# Altium PCB AD_Attacking_Board.pcbdoc
Units mm, origin at the board's own origin, x right, y up, seen from the top; angles counter-clockwise.
Board outline 102.75 x 76.05 mm, 2 copper layers (Top Layer, Bottom Layer); 65 components, 72 nets, 272 pads, 189 vias.
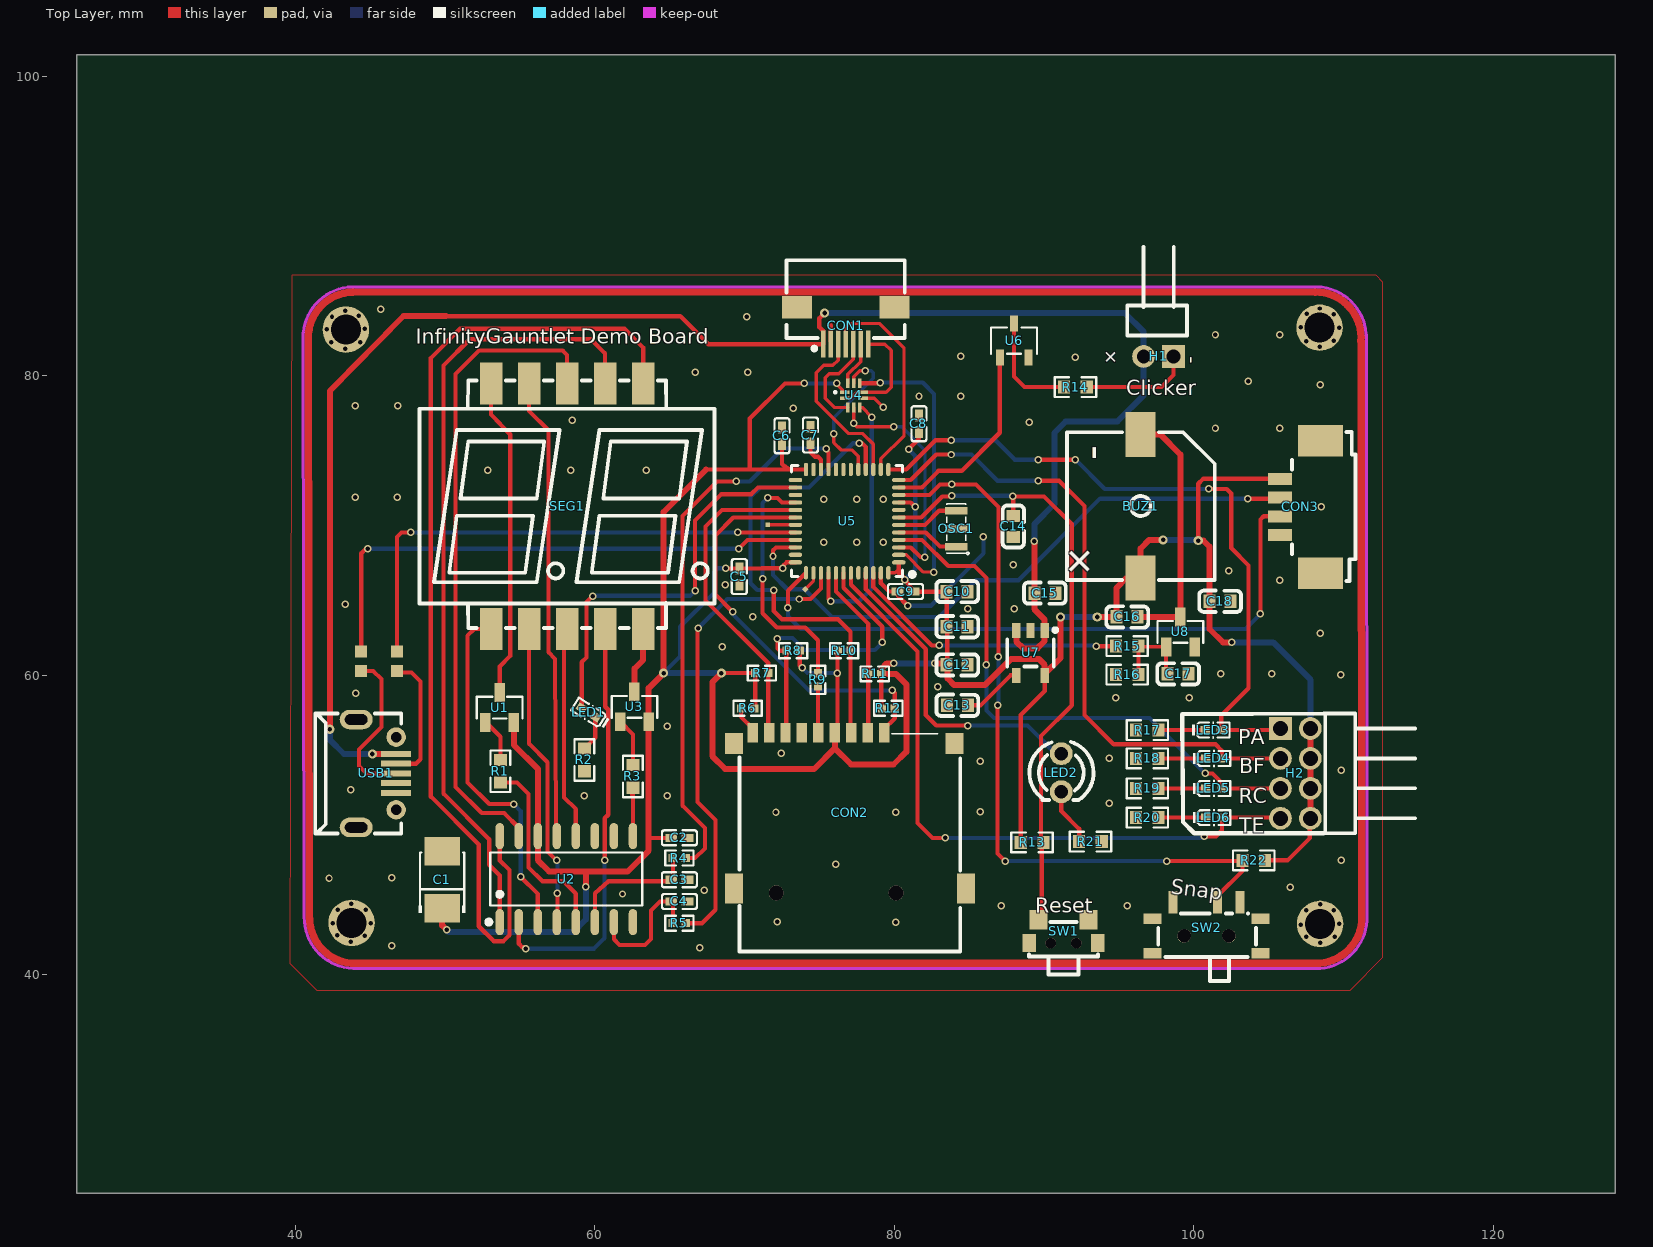
[diagram p0: Top Layer view]
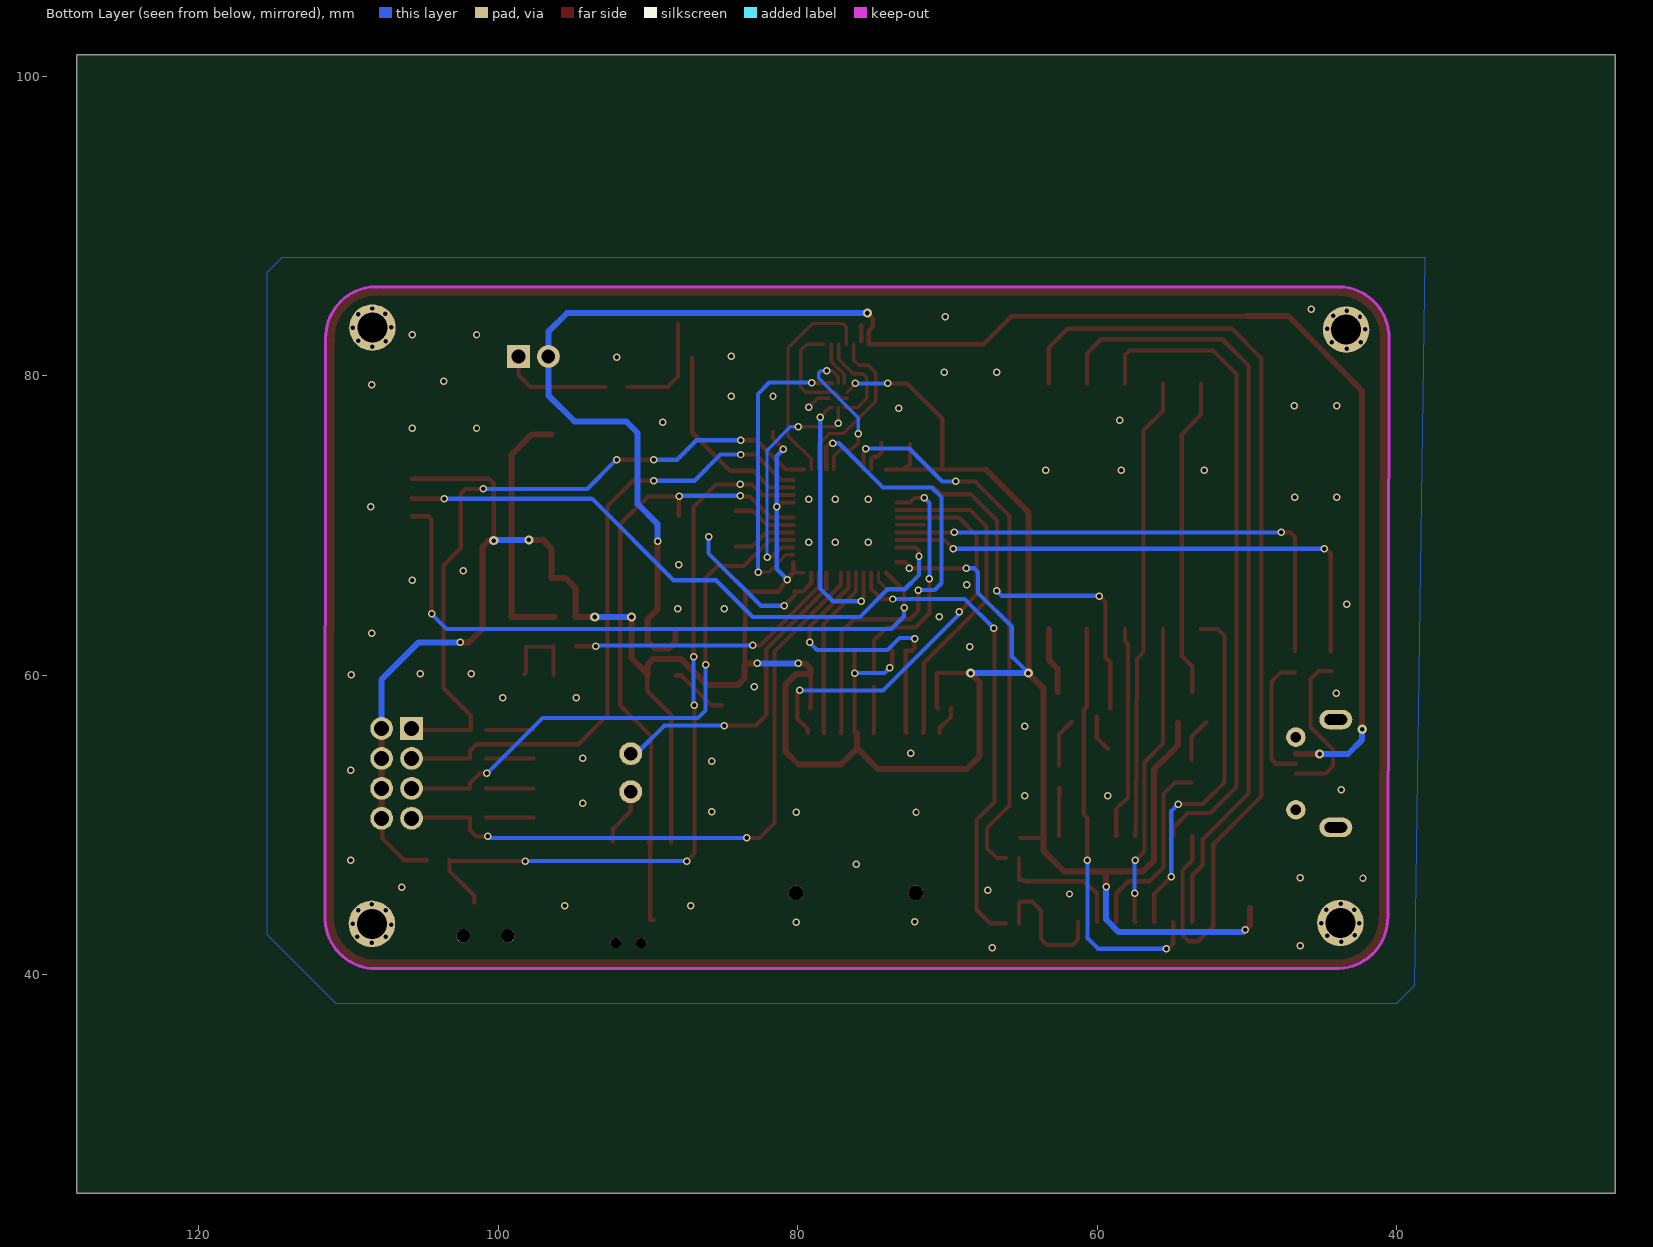
[diagram p1: Bottom Layer view, seen from below]

## Layer stack, top to bottom
Top Layer: signal copper (thickness not stored)
Dielectric: dielectric 0.32, FR-4, Dk 4.8
Bottom Layer: signal copper (thickness not stored)

## Board outline
128.15,25.4 25.4,25.4 25.4,101.45 128.15,101.45

## Components (designator, comment, footprint, x,y, rotation, side; value= is the part's Value field where it differs from the comment)
BUZ1 "BUZ-SMD_GSD9605YB-3V2800" BUZ-SMD_GSD9605YB-3V2800 96.45,71.3 r0 top
C1 "CAP-SMD_L3.5-W2.8-R-RD" CAP-SMD_L3.5-W2.8-R-RD 49.8,46.35 r270 top
C2 "C0402" C0402_NEW 65.65,49.15 r180 top
C3 "C0402" C0402 65.65,46.35 r180 top
C4 "C0402" C0402 65.65,44.9 r180 top
C5 "C0402" C0402_NEW 69.65,66.6 r90 top
C6 "C0402" C0402_NEW 72.5,76 r270 top
C7 "C0402" C0402 74.4,76.05 r270 top
C8 "C0402" C0402_NEW 81.65,76.8 r270 top
C9 "C0402" C0402_NEW 80.75,65.6 r0 top
C10 "C0603" C0603 84.2,65.6 r180 top
C11 "C0603" C0603 84.2,63.25 r180 top
C12 "C0603" C0603 84.2,60.7 r180 top
C13 "C0603" C0603 84.215,58 r0 top
C14 "C0603" C0603 87.95,69.95 r90 top
C15 "C0603" C0603 90.05,65.5 r180 top
C16 "C0603" C0603 95.55,63.9 r180 top
C17 "C0603" C0603 98.95,60.1 r180 top
C18 "C0603" C0603 101.75,64.95 r180 top
CON1 "FPC-SMD_7P-P0.50_KINGHELM_KH-FG0.5-H2.0-7PIN" FPC-SMD_7P-P0.50_KINGHELM_KH-FG0.5-H2.0-7PIN 76.75,83.35 r180 top
CON2 "TF-SMD_TF-01A" TF-SMD_TF-01A 77.032,50.961 r0 top
CON3 "CONN-SMD_4P-P1.25_X9821WRS-04-9TSN" CONN-SMD_4P-P1.25_X9821WRS-04-9TSN 107.1,71.25 r90 top
H1 "HDR-TH_2P-P2.00-H-M-W6.8" HDR-TH_2P-P2.00-H-M-W6.8 97.65,81.3 r180 top
H2 "HDR-TH_8P-P2.00-H-F-R2-C2-S2.00-W8.8" HDR-TH_8P-P2.00-H-F-R2-C2-S2.00-W8.8 106.782,53.456 r270 top
LED1 "LED0402-RD" LED0402-RD 59.588,57.525 r148 top
LED2 "C99771" LED-TH_BD3.0-P2.54-FD 91.15,53.5 r270 top
LED3 "LED0402-RD" LED0402-RD 101.3,56.35 r0 top
LED4 "LED0402-RD" LED0402-RD 101.35,54.45 r0 top
LED5 "LED0402-RD" LED0402-RD 101.35,52.45 r0 top
LED6 "LED0402-RD" LED0402-RD 101.35,50.5 r0 top
OSC1 "OSC-SMD_3P-L3.2-W1.3-P1.20" OSC-SMD_3P-L3.2-W1.3-P1.20 84.15,69.8 r90 top
R1 "R0603" R0603 53.7,53.6 r270 top
R2 "R0603" R0603 59.3,54.35 r270 top
R3 "R0603" R0603 62.55,53.25 r270 top
R4 "R0402" R0402 65.65,47.8 r0 top
R5 "R0402" R0402 65.65,43.45 r0 top
R6 "R0402" R0402 70.2,57.8 r0 top
R7 "R0402" R0402 71.15,60.15 r180 top
R8 "R0402" R0402 73.25,61.65 r0 top
R9 "R0402" R0402 74.9,59.7 r270 top
R10 "R0402" R0402 76.65,61.65 r180 top
R11 "R0402" R0402 78.7,60.1 r0 top
R12 "R0402" R0402 79.6,57.8 r180 top
R13 "R0603" R0603 89.2,48.85 r180 top
R14 "R0603" R0603 92.1,79.25 r0 top
R15 "R0603" R0603 95.55,61.95 r180 top
R16 "R0603" R0603_NEW 95.55,60.05 r0 top
R17 "R0603" R0603 96.9,56.35 r0 top
R18 "R0603" R0603 96.9,54.45 r0 top
R19 "R0603" R0603 96.9,52.45 r0 top
R20 "R0603" R0603 96.9,50.5 r0 top
R21 "R0603" R0603 93.1,48.9 r180 top
R22 "R0603" R0603 104,47.65 r0 top
SEG1 "LED-SEG-SMD_SLS0392FW2A1GD" LED-SEG-SMD_SLS0392FW2A1GD 58.15,71.3 r0 top
SW1 "SW-SMD_TS24CA" SW-SMD_TS24CA 91.3,42.9 r180 top
SW2 "SW-TH_MSK12C02-HB" SW-TH_MSK12C02-HB 100.85,43.15 r0 top
U1 "SOT-23-3_L2.9-W1.3-P1.90-LS2.4-BR" SOT-23-3_L2.9-W1.3-P1.90-LS2.4-BR 53.65,57.85 r270 top
U2 "SOP-16_L10.0-W3.9-P1.27-LS6.0-BL" SOP-16_L10.0-W3.9-P1.27-LS6.0-BL 58.1,46.4 r0 top
U3 "SOT-23-3_L2.9-W1.3-P1.90-LS2.4-BR" SOT-23-3_L2.9-W1.3-P1.90-LS2.4-BR 62.65,57.9 r270 top
U4 "RS2117" WQFN-10_L1.8-W1.4-P0.40-BL-EP 77.3,78.7 r270 top
U5 "STM32F412CEU6" UFQFPN-48_L7.0-W7.0-P0.50-BL-EP 76.85,70.3 r90 top
U6 "AO3400A" SOT-23-3_L2.9-W1.6-P1.90-LS2.8-BR 88,82.35 r270 top
U7 "RT9193" SOT-23-5_L3.0-W1.7-P0.95-LS2.8-BR 89.097,61.502 r90 top
U8 "SOT-23-3_L2.9-W1.3-P1.90-LS2.4-BR" SOT-23-3_L2.9-W1.3-P1.90-LS2.4-BR 99.1,62.9 r270 top
USB1 "MICRO-USB-SMD_MICROXNJ" MICRO-USB-SMD_MICROXNJ 45.4,53.45 r270 top

## Footprints (in the part's own frame and the unit in brackets; to place one, negate y for a bottom-side part, rotate by r counter-clockwise, add the part's x,y. Pads: shape width x height; smd on the part's side, far side on the other; paste and mask are expansions set on the pad)
BUZ-SMD_GSD9605YB-3V2800 [mm]
  rect 2x3 smd: 1(0,-4.8) 2(0,4.8)
  silkscreen extent -4.92,-4.94 4.95,4.93
C0402 [mm]
  rect 0.79x0.54 smd: 1(-0.545,0) 2(0.545,0)
  silkscreen extent -1.17,-0.5 1.17,0.5
C0402_NEW [mm]
  rect 0.79x0.54 smd: 1(-0.545,0) 2(0.545,0)
  silkscreen extent -1.17,-0.5 1.17,0.5
C0603 [mm]
  rect 0.8x0.9 smd: 1(-0.7,0) 2(0.7,0)
  silkscreen extent -1.41,-0.71 1.39,0.72
CAP-SMD_L3.5-W2.8-R-RD [mm]
  rect 1.9x2.376 smd: 1(1.898,0) 2(-1.899,0)
  silkscreen extent -1.83,-1.55 2.21,1.55
CONN-SMD_4P-P1.25_X9821WRS-04-9TSN [mm]
  rect 0.8x1.6 smd: 1(-1.875,1.35) 2(-0.625,1.35) 3(0.625,1.35) 4(1.875,1.35)
  rect 2.1x3 smd: 5(4.425,-1.35) 6(-4.425,-1.35)
  silkscreen extent -4.95,-3.7 5,0.55
FPC-SMD_7P-P0.50_KINGHELM_KH-FG0.5-H2.0-7PIN [mm]
  rect 0.3x1.8 smd: 1(1.5,1.225) 2(1,1.225) 3(0.5,1.225) 4(0,1.225) 5(-0.5,1.225) 6(-1,1.225) 7(-1.5,1.225)
  rect 2x1.5 smd: 8(-3.25,-1.225) 9(3.25,-1.225)
  silkscreen extent -3.95,-4.38 3.95,1.65
HDR-TH_2P-P2.00-H-M-W6.8 [mil]
  rect 60x60 hole 36: 1(-39.37,0)
  round 60 hole 36: 2(39.37,0)
  silkscreen extent -75,-287 82,-55
HDR-TH_8P-P2.00-H-F-R2-C2-S2.00-W8.8 [mm]
  rect 1.524x1.524 hole 1: 1(-3,-1)
  round 1.524 hole 1: 2(-3,1) 3(-1,-1) 4(-1,1) 5(1,-1) 6(1,1) 7(3,-1) 8(3,1)
  silkscreen extent -4,2 4,8
LED0402-RD [mm]
  rect 0.636x0.54 smd: 1(-0.538,0) 2(0.538,0)
  silkscreen extent -1.39,-0.54 1.09,0.54
LED-SEG-SMD_SLS0392FW2A1GD [mm]
  rect 1.5x2.8 smd: 1(-5.08,-8.201) 2(-2.54,-8.201) 3(0,-8.201) 4(2.54,-8.201) 5(5.08,-8.2) 6(5.08,8.201) 7(2.54,8.201) 8(0,8.201) 9(-2.54,8.201) 10(-5.08,8.201)
  silkscreen extent -9.85,-8.13 9.85,8.38
LED-TH_BD3.0-P2.54-FD [mil]
  round 60 hole 36: 1(-50,-0.01) 2(50,-0.01)
  silkscreen extent -81,-84 72,85
MICRO-USB-SMD_MICROXNJ [mm]
  rect 0.4x2 smd: 1(-1.3,1.327) 2(-0.65,1.327) 3(0,1.327) 4(0.65,1.327) 5(1.3,1.327)
  round 1.3 hole 0.7: 6(2.425,1.335) 9(-2.425,1.335)
  oval 1.3x2.2 hole 0.7 slot 1.5 at 90 deg: 7(3.6,-1.335) 8(-3.6,-1.335)
  silkscreen extent -4,-4.07 4,1.68
OSC-SMD_3P-L3.2-W1.3-P1.20 [mm]
  rect 0.5x1.5 smd: 1(-1.2,0) 2(0,0) 3(1.2,0)
  silkscreen extent -1.73,-0.84 1.65,0.64
R0402 [mm]
  rect 0.566x0.54 smd: 1(-0.433,0) 2(0.433,0)
  silkscreen extent -0.94,-0.5 0.94,0.5
R0603 [mm]
  rect 0.806x0.864 smd: 1(-0.753,0) 2(0.753,0)
  silkscreen extent -1.39,-0.66 1.39,0.66
R0603_NEW [mm]
  rect 0.806x0.864 smd: 1(-0.753,0) 2(0.753,0)
  silkscreen extent -1.39,-0.66 1.39,0.66
SOP-16_L10.0-W3.9-P1.27-LS6.0-BL [mm]
  oval 0.56x1.745 smd: 1(-4.445,-2.873) 2(-3.175,-2.873) 3(-1.905,-2.873) 4(-0.635,-2.873) 5(0.635,-2.873) 6(1.905,-2.873) 7(3.175,-2.873) 8(4.445,-2.873) 9(4.445,2.873) 10(3.175,2.873) 11(1.905,2.873) 12(0.635,2.873) 13(-0.635,2.873) 14(-1.905,2.873) 15(-3.175,2.873) 16(-4.445,2.873)
  silkscreen extent -5.33,-3.02 5.08,1.77
SOT-23-3_L2.9-W1.3-P1.90-LS2.4-BR [mm]
  rect 1.25x0.7 smd: 1(1,-0.95) 2(1,0.95) 3(-1,0)
  silkscreen extent -0.73,-1.53 0.73,1.53
SOT-23-3_L2.9-W1.6-P1.90-LS2.8-BR [mm]
  rect 1.07x0.532 smd: 1(1.135,-0.95) 2(1.135,0.95) 3(-1.135,0)
  silkscreen extent -0.88,-1.54 0.88,1.54
SOT-23-5_L3.0-W1.7-P0.95-LS2.8-BR [mm]
  rect 1x0.55 smd: 1(1.5,-0.95) 2(1.5,0) 3(1.5,0.95) 4(-1.5,0.95) 5(-1.5,-0.95)
  silkscreen extent -0.9,-1.78 1.65,1.55
SW-SMD_TS24CA [mm]
  rect 0.9x1.2 smd: 1(-2.3,0.775) 2(2.3,0.775)
  rect 1.2x1.3 smd: 3(-1.675,-0.775) 4(1.675,-0.775)
  round 0.7 hole 0.7 unplated: ""(-0.85,0.775) ""(0.85,0.775)
  silkscreen extent -2.3,-0.63 2.3,2.87
SW-TH_MSK12C02-HB [mm]
  rect 0.6x1.524 smd: 1(-2.25,1.7) 2(0.75,1.7) 3(2.25,1.7)
  rect 1.2x0.7 smd: 4(-3.6,-1.7) 4(-3.6,0.6) 4(3.6,-1.7) 4(3.6,0.6)
  round 0.9 hole 0.9 unplated: ""(-1.5,-0.55) ""(1.5,-0.55)
  silkscreen extent -3.22,-3.57 3.3,0.95
TF-SMD_TF-01A [mm]
  rect 0.7x1.3 smd: 1(2.292,5.2) 2(1.192,5.198) 3(0.096,5.2) 4(-1.004,5.2) 5(-2.103,5.2) 6(-3.201,5.2) 7(-4.297,5.2) 8(-5.395,5.2) 9(-6.499,5.2)
  rect 1.2x1.397 smd: 10(-7.747,4.502) 13(6.985,4.502)
  rect 1.2x2 smd: 11(-7.747,-5.2) 12(7.747,-5.2)
  round 1 hole 1 unplated: ""(-4.915,-5.49) ""(3.084,-5.487)
  silkscreen extent -7.37,-9.4 7.37,5.14
UFQFPN-48_L7.0-W7.0-P0.50-BL-EP [mm]
  oval 0.28x0.9 smd: 1(-2.751,-3.449) 2(-2.25,-3.449) 3(-1.75,-3.449) 4(-1.25,-3.449) 5(-0.749,-3.449) 6(-0.249,-3.449) 7(0.249,-3.449) 8(0.749,-3.449) 9(1.25,-3.449) 10(1.75,-3.449) 11(2.25,-3.449) 12(2.751,-3.449) 25(2.751,3.449) 26(2.25,3.449) 27(1.75,3.449) 28(1.25,3.449) 29(0.749,3.449) 30(0.249,3.449) 31(-0.249,3.449) 32(-0.749,3.449) 33(-1.25,3.449) 34(-1.75,3.449) 35(-2.25,3.449) 36(-2.751,3.449)
  oval 0.9x0.28 smd: 13(3.449,-2.751) 14(3.449,-2.25) 15(3.449,-1.75) 16(3.449,-1.25) 17(3.449,-0.749) 18(3.449,-0.249) 19(3.449,0.249) 20(3.449,0.749) 21(3.449,1.25) 22(3.449,1.75) 23(3.449,2.25) 24(3.449,2.751) 37(-3.449,2.751) 38(-3.449,2.25) 39(-3.449,1.75) 40(-3.449,1.25) 41(-3.449,0.749) 42(-3.449,0.249) 43(-3.449,-0.249) 44(-3.449,-0.749) 45(-3.449,-1.25) 46(-3.449,-1.75) 47(-3.449,-2.25) 48(-3.449,-2.751)
  silkscreen extent -3.7,-4.5 3.7,3.7
WQFN-10_L1.8-W1.4-P0.40-BL-EP [mm]
  rect 0.224x0.665 smd: 1(-0.2,-0.607) 2(0.2,-0.607) 6(0.2,0.607) 7(-0.2,0.607)
  rect 0.665x0.224 smd: 3(0.807,-0.4) 4(0.807,0) 5(0.807,0.4) 8(-0.807,0.4) 9(-0.807,0) 10(-0.807,-0.4)
  silkscreen extent -0.27,-1.31 -0.12,-1.17

## Free pads (board coordinates)
  rect 0.8x0.8 smd: 3(44.375,60.3) 3(44.375,61.6) 3(46.8,60.3) 3(46.8,61.6)
  rect 0.3x0.3 smd: 3(71.55,70.05)
  rect 0.3x0.3 smd rot 45: 3(74.05,65.75)
  round 3.1 hole 2: ""(43.377,83.092) ""(43.758,43.468) ""(108.401,83.219) ""(108.437,43.408)

## Via types
v1: diameter 0.5, hole 0.3, Top Layer to Bottom Layer, tented both sides, 180 vias
v2: diameter 0.61, hole 0.305, Top Layer to Bottom Layer, tented both sides, 9 vias

## Nets (pads, with @x,y where several pads share a name; then routed paths per layer and width w, separated by ;. In a path a pad name is that pad's centre, name@x,y a point inside that pad or via, vN(x,y) a via of type N, cw(c..) or ccw(c..) an arc to the next point about the centre after c; other vN are vias at no path point)
3V3: BUZ1.1 C1.1 C2.2 C5.2 C6.2 C8.2 C9.2 C10.2 C11.2 C12.2 C16.2 C18.2 CON2.4 CON3.4 H2.2 H2.4 H2.6 H2.8 R6.2 R7.2 R8.2 R10.2 R11.2 R12.2 R13.2 R22.2 U1.2 U2.14 U3.2 U4.1 U5.1 U5.9 U5.24 U5.36 U5.48 U7.5 | length 251.7
  Top Layer w0.224: v1(76.15,79.5) 76.15,79.45 76.3,79.3 U4.1 ; U5.48 80.049,66.851 80.25,67.052
  Top Layer w0.28: 63.55,49.15 C2.2 ; 67.435,73.749 U5.24 70.349,73.749 70.349,77.148 72.701,79.5 v1(74,79.5) ; v2(68.45,60.15) R7.2 70.717,57.884 R6.2 ; v1(68.75,67.15) 68.755,67.145 C5.2 71.155,67.145 71.16,67.15 v1(72.55,67.15) 72.6,67.2 72.6,67.35 72.799,67.549 U5.36 ; C6.2@72.501,75.454 72.501,74.095 72.968,73.75 ; R8.2@73.683,61.65 73.683,60.667 v1(73.85,60.5) ; CON2.4@76.18,56.16 76.2,56.181 v1(76.2,60.15) 76.217,60.167 R10.2 ; R11.2 79.133,57.834 R12.2 ; U5.9 81.1,71.549 v1(81.4,71.25) ; v1(80.95,75.1) 81.65,75.8 C8.2 ; R13.2 88.447,57.347 90.047,58.947 U7.5@90.047,60.001 ; v2(100.3,69) 100.299,72.8 100.626,73.125 CON3.4 ; R22.2 106.25,47.65 107.75,49.15 107.75,50.424 H2.8
  Top Layer w0.3: U5.1 80.3,66.85 80.7,66.45 v1(80.7,66.4) C9.2 ; C9.2@81.294,65.599 C10.2@83.499,65.599 ; C12.2@83.55,60.7 83.55,63.25 C11.2 83.5,65.55 C10.2@83.55,65.6
  Top Layer w0.4: C1.1@49.8,44.451 49.8,43.301 v1(50.098,43.002) ; U1.2 54.599,55.35 56.194,53.755 56.194,49.272 56.194,47.656 56.951,46.9 62.199,46.9 63.6,48.301 U3.2 63.6,59.15 v2(64.6,60.15) 64.6,70.914 67.435,73.749 ; v1(59.4,45.9) 59.4,46.85 59.45,46.9 ; v2(68.45,60.15) 67.85,59.551 67.85,54.601 68.701,53.75 74.65,53.75 76.029,55.127 CON2.4@76.029,56.168 ; CON2.4@76.029,56.16 76.029,55.139 77.118,54.05 79.951,54.05 80.799,54.898 80.799,59.401 80.1,60.1 R11.2 79.133,60.428 79.505,60.8 v1(79.95,60.8) ; v1(82.7,60.8) 83.45,60.8 83.55,60.7 83.55,59.8 83.999,59.351 86.052,59.351 87.802,61.101 89.648,61.101 90.047,60.702 U7.5 ; U7.5 90.047,60.097 91.1,61.15 v2(91.1,63.9) ; v2(93.55,63.9) 94.85,63.9 94.85,65.851 95.499,66.5 BUZ1.1 96.45,68.474 97.026,69.05 v2(97.95,69.05) ; v2(100.3,69) 100.649,69 101.05,68.599 101.05,64.949 101.05,63.1 101.95,62.201 v1@102.549,62.203 ; H2.8 H2.6 H2.4 H2.2
  Bottom Layer w0.28: v2(64.6,60.15) 65.7,61.25 65.7,63.25 67.95,65.5 67.95,66.9 68.2,67.15 v1(68.75,67.15) ; v1(73.85,60.5) 74.2,60.15 v1(76.2,60.15) ; v1(74,79.5) v1(76.15,79.5) ; v1(80.7,66.4) 81.4,67.1 v1(81.4,71.25) 81.4,74.65 v1(80.95,75.1)
  Bottom Layer w0.4: v1(50.098,43.002) 50.251,42.85 58.55,42.85 59.4,43.7 v1(59.4,45.9) ; v2(64.6,60.15) v2(68.45,60.15) ; v1(79.95,60.8) v1(82.7,60.8) ; v2@91.1,63.9 v2@93.55,63.9 ; v2(97.95,69.05) 100.3,69.05 v2(100.3,69) ; v1@102.549,62.203 105.295,62.203 107.799,59.701 H2.2@107.781,56.455
  other v1: 102.55,62.204
A: SEG1.3 U2.12 | length 14.2
  Top Layer w0.28: SEG1.3 58.15,62.305 57.949,62.104 57.949,51.85 58.734,51.065 U2.12@58.734,49.272
B: SEG1.9 U2.13 | length 31
  Top Layer w0.28: SEG1.9@55.61,79.5 55.61,77.659 56.9,76.371 56.9,61.55 57.35,61.101 57.4,50.25 U2.13@57.464,49.272
BEEP: R15.2 U5.46 | length 18.8
  Top Layer w0.28: U5.46 78.6,65.9 82.5,62 v1(83,62) ; v1@93.499,61.949 R15.2@94.797,61.949
  Bottom Layer w0.28: v1(83,62) 93.45,62 v1(93.5,61.95)
BP: C13.2 U7.4 | length 3.9
  Top Layer w0.28: C13.2@85.051,57.999 85.749,57.999 87.753,60.003 U7.4
C: SEG1.8 U2.15 | length 43.6
  Top Layer w0.28: U2.15@54.924,49.272 54.924,49.826 53.949,50.801 52.45,50.801 50.7,52.551 50.7,80.128 52.267,81.695 57.855,81.695 58.15,81.4 SEG1.8
CLICK: H1.1 R14.2 | length 7.4
  Top Layer w0.28: R14.2@92.854,79.249 97.85,79.249 98.65,80.049 H1.1@98.65,81.289
D: SEG1.6 U2.16 | length 66.7
  Top Layer w0.28: U2.16@53.654,49.272 53.654,47.646 54.299,47.001 54.299,42.65 53.9,42.249 53.25,42.249 52.249,43.25 52.249,48.7 49.049,51.901 49.049,81.2 51,83.15 51.914,83.15 61.978,83.15 63.23,81.898 SEG1.6
DIG0: R1.2 U2.5 | length 12.9
  Top Layer w0.28: R1.2@53.7,52.846 54.802,52.846 55.572,52.079 55.572,47.179 56.499,46.249 57.901,46.249 58.734,45.416 U2.5@58.734,43.526
DIG1: R3.2 U2.9 | length 3.7
  Top Layer w0.28: 62.5,52.047 62.5,52.447 R3.2 62.545,52.492 U2.9
DIG_1: SEG1.10 U1.3 | length 21.5
  Top Layer w0.28: SEG1.10@53.07,79.5 53.07,77.42 54.35,76.099 54.35,61.299 53.649,60.6 U1.3
DIG_2: SEG1.5 U3.3 | length 4.4
  Top Layer w0.4: U3.3 62.65,60.45 63.23,61.03 SEG1.5
DP: SEG1.2 U2.4 | length 20.4
  Top Layer w0.28: SEG1.2 55.61,55.44 56.85,54.2 56.85,48.25 v1(57.45,47.65) ; U2.4 57.5,43.563 v1(57.5,45.45)
  Bottom Layer w0.28: v1(57.45,47.65) 57.5,47.65 v1(57.5,45.45)
DR: R14.1 U6.3 | length 7.2
  Top Layer w0.28: U6.3 88,79.95 88.7,79.25 R14.1
E: SEG1.7 U2.1 | length 52.6
  Top Layer w0.28: U2.1@53.654,43.526 53.654,46.646 52.95,47.349 52.95,49.051 49.9,52.099 49.9,80.699 51.65,82.449 59.747,82.449 60.69,81.507 SEG1.7
EYE: LED1.2 U5.26 | length 27.1
  Top Layer w0.28: LED1.2 59.131,60.881 59.45,61.2 59.45,64.896 v1@59.849,65.299 ; v1(66.7,65.65) 66.7,70.35 68.45,72.1 70.45,72.1 70.9,72.55 U5.26
  Bottom Layer w0.28: v1@59.849,65.312 66.356,65.312 v1(66.7,65.65)
  other v1: 59.85,65.3
F: SEG1.4 U2.2 | length 28.6
  Top Layer w0.28: U2.2 54.925,42.075 55.15,41.85 55.4,41.85 v1(55.4,41.75) ; v1(60.65,47.65) v1@60.69,47.69
  Top Layer w0.3: v1(60.65,47.65) 60.649,50.45 60.901,50.699 60.901,57.7 60.69,57.91 SEG1.4
  Bottom Layer w0.28: v1(55.4,41.75) 59.95,41.75 60.65,42.45 v1(60.65,47.65)
G: SEG1.1 U2.3 | length 23.8
  Top Layer w0.28: SEG1.1 51.95,63.1 51.5,62.65 51.5,52.851 52.95,51.4 v1(54.6,51.4) ; v1(55.05,46.55) 56.195,45.405 U2.3
  Bottom Layer w0.28: v1(54.6,51.4) 55.05,50.95 v1(55.05,46.55)
GATE: U5.11 U6.1 | length 13.3
  Top Layer w0.28: U5.11 81.85,72.55
  Top Layer w0.3: 81.85,72.55 81.851,72.551 82.95,73.651 84.5,73.651 87.05,76.201 U6.1
GND: C1.2 C2.1 C3.1 C4.1 C5.1 C6.1 C7.1 C8.1 C9.1 C10.1 C11.1 C12.1 C13.1 C14.1 C15.1 C17.1 C18.1 CON1.2 CON1.8 CON1.9 CON2.6 CON2.10 CON2.11 CON2.12 CON2.13 CON3.1 CON3.5 CON3.6 OSC1.2 R2.2 R16.1 R17.1 R18.1 R19.1 R20.1 R21.1 SW1.1 SW1.2 SW1.3 SW2.1 SW2.4 U2.8 U4.6 U5.8 U5.20 U5.23 U5.35 U5.44 U5.47 U6.2 U7.2 U8.2 USB1.5 USB1.6 USB1.7 USB1.8 USB1.9 | length 238.4
  Top Layer w0.224: U4.6 78.65,78.5 v1(79.25,77.9)
  Top Layer w0.28: U5.47 79.101,66.149 79.651,65.599 C9.1@80.205,65.599 ; C9.1 80.205,65.345 v1(80.9,64.65)
  Top Layer w0.3: CON1.2@75.75,82.3 75.75,83.375
  Top Layer w0.5: 40.877,82.816 cw(c43.909,82.557) 43.85,85.6 ; 40.879,82.787 40.944,43.768 ; 40.95,43.75 ccw(c44.013,43.829) 43.734,40.777 ; 43.809,40.769 108.076,40.767 ; 43.857,85.603 108.124,85.601 ; 108.09,40.764 ccw(c108.137,43.862) 111.219,43.545 ; 108.124,85.609 cw(c108.117,82.557) 111.158,82.307 ; 111.17,82.306 111.217,43.544
  Bottom Layer w0.28: v1(80.9,64.65) 82.45,64.65 85.95,68.15 v1(85.95,69.25)
  other v1: 66.999,41.801 46.449,41.951 80.1,43.5 72.2,43.551 87.149,44.601 95.549,44.601 61.85,45.4 67.3,45.65 106.45,45.851 42.25,46.451 46.45,46.5 76.099,47.401 109.849,47.651 72.1,50.85 80.1,50.85 85.749,50.901 94.349,51.451 59.3,51.95 64.85,51.95 43.7,52.35 109.849,53.651 85.749,54.251 94.349,54.451 72.45,54.8 64.85,56.6 94.799,58.501 99.7,58.5 44.049,58.801 82.9,59.25 109.799,60.051 101.8,60.1 105.2,60.1 68.5,61.9 108.45,62.8 70.55,63.9 84.9,64.45 88,64.45 43.35,64.75 68.7,66.05 105.75,66.35 102.35,67 87.95,67.4 75.3,68.875 77.5,68.875 79.25,68.875 108.5,71.25 75.3,71.75 77.5,71.75 79.25,71.75 44,71.9 46.8,71.9 52.85,73.7 58.4,73.7 63.45,73.7 101.45,76.5 105.75,76.5 89,76.9 58.5,77.05 73.25,77.85 44,78 46.85,78 81.65,78.65 84.45,78.65 108.449,79.401 103.65,79.65 66.7,80.25 70.199,80.251 92.1,81.25 84.45,81.3 101.45,82.75 105.75,82.75 70.15,83.95 45.699,84.45
IIC-SCL: R4.2 U5.21 | length 37.3
  Top Layer w0.28: R4.2@66.082,47.799 66.699,47.799 67.35,48.449 67.35,49.8 65.851,51.299 65.851,70.651 68.15,72.95 v1@69.45,72.95 ; v1(75.45,75.15) 75.45,75.039 75.601,74.889 U5.21
  Bottom Layer w0.28: v1(69.45,72.95) 70.35,72.95 72.55,75.15 v1(75.45,75.15)
IIC-SDA: R5.2 U5.39 | length 32
  Top Layer w0.28: R5.2 67.149,43.45 68.051,44.349 68.051,50.349 66.849,51.55 66.849,63.099 v1(66.9,63.15) ; v1(73.65,65.1) 74.402,65.1 75.1,65.798 U5.39
  Bottom Layer w0.28: v1(66.9,63.15) 68.85,65.1 v1(73.65,65.1)
KEY: R22.1 SW2.2 U5.10 | length 50.8
  Top Layer w0.28: U5.10 82.35,72.05 83.05,72.75 v1(83.85,72.75) 85.45,72.75 86.95,71.25 v1(86.95,61.25) ; v1(86.9,58) 86.9,48.1 v1(87.4,47.6) ; v1(98.2,47.6) 103.197,47.6 R22.1 103.247,46.947 101.599,45.299 SW2.2
  Bottom Layer w0.28: v1(86.9,58) 86.95,58 v1(86.95,61.25) ; v1(87.4,47.6) v1(98.2,47.6)
MOSI_IN: U4.9 U5.17 | length 10.6
  Top Layer w0.224: v1(75.95,76.15) 75.95,75.551 76.45,75.05 77.2,75.05 77.599,74.649 U5.17 ; U4.9 77.299,79.95 77.7,80.349 v1@78.051,80.349
  Bottom Layer w0.224: v1(75.95,76.15) 75.95,77.202 78.599,79.851 78.599,80.202 78.449,80.349 v1@78.051,80.349
  other v1: 78.05,80.35
NRST: C14.2 R13.1 SW1.4 U5.7 | length 42
  Top Layer w0.28: U5.7 81.799,70.549 83.2,71.95 83.8,71.95 v1@83.85,72 ; C14.2 87.95,71.9 v1(87.899,71.95) 89.827,71.95 89.828,71.949 89.999,71.949 91.85,70.1 91.85,58.551 91.85,57.999 89.801,55.95 89.801,48.85 R13.1 89.849,48.746 89.849,43.674 SW1.4@89.625,43.674
  Bottom Layer w0.28: v1@83.85,72 87.849,72 v1(87.899,71.95)
  other v1: 83.85,72
OSC-IN: OSC1.1 U5.5 | length 4.2
  Top Layer w0.28: U5.5 82.099,69.551 83.05,68.6 OSC1.1
OSC-OUT: OSC1.3 U5.6 | length 4.2
  Top Layer w0.28: U5.6 82.05,70.051 82.999,71 OSC1.3
RXD: pad.3@71.55,70.05 U5.31 | length 1.9
  Top Layer w0.224: pad.3@71.55,70.05 U5.31 U5.31
S$1711: LED2.2 R21.2 | length 3.8
  Top Layer w0.28: LED2.2 91.15,50.95 92.347,49.753 R21.2
S$14186: 
S$16831: R1.1 U1.1 | length 2.9
  Top Layer w0.28: U1.1 52.75,56.85 53.7,55.9 R1.1
S$16841: R3.1 U3.1 | length 3.2
  Top Layer w0.28: U3.1 62.55,56.05 R3.1
S$17055: C17.2 R15.1 R16.2 U8.1 | length 5.6
  Top Layer w0.224: R15.1@96.303,61.949 96.352,61.9 U8.1
  Top Layer w0.28: R16.2 R15.1@96.303,61.949 ; U8.1 98.15,60.2 C17.2
S$192738: LED1.1 R2.1 | length 2.4
  Top Layer w0.3: R2.1 60.044,55.848 LED1.1
S$197762: BUZ1.2 C16.1 U8.3 | length 16.9
  Top Layer w0.4: C16.1@96.25,63.9 99.1,63.9 99.1,74.75 97.75,76.1 BUZ1.2
S$204186: 
S$205630: LED3.1 R17.2 | length 3.1
  Top Layer w0.28: R17.2 LED3.1
S$205634: LED4.1 R18.2 | length 3.2
  Top Layer w0.28: R18.2 LED4.1
S$205638: LED5.1 R19.2 | length 3.2
  Top Layer w0.28: R19.2 LED5.1
S$205642: LED6.1 R20.2 | length 3.2
  Top Layer w0.28: R20.2 LED6.1
S_B: H2.3 LED4.2 U5.12 | length 43.1
  Top Layer w0.28: U5.12 81.101,73.051 82.8,74.75 v1(83.8,74.75) ; v1(89.6,73) 91,73 92.699,71.301 92.699,58.35 92.699,57.352 94.65,55.401 101.449,55.401 101.889,54.962 101.889,54.451 H2.3@105.782,54.456
  Bottom Layer w0.28: v1(83.8,74.75) 85.15,74.75 86.9,73 v1(89.6,73)
S_C: H2.5 LED5.2 U5.4 | length 37.8
  Top Layer w0.28: U5.4 81.85,69.05 83.6,67.3 85.35,67.3 86.15,66.5 v1(86.15,60.7) ; v1(100.75,53.45) 101.25,53.45 101.888,52.812 LED5.2 105.775,52.45 H2.5@105.782,52.457
  Bottom Layer w0.28: v1(86.15,60.7) 86.15,57.65 86.649,57.151 97.049,57.151 v1(100.75,53.45)
S_E: H2.7 LED6.2 U5.43 | length 44
  Top Layer w0.28: U5.43 77.099,66.053 81.551,61.601 81.551,50.151 82.549,49.15 83.1,49.15 ; v1(100.7,49.25) 101.477,49.25 101.888,49.662 LED6.2 105.738,50.5 H2.7
  Bottom Layer w0.28: v1@83.4,49.15 100.7,49.15 v1@100.7,49.249
  other v1: 83.4,49.151
S_P: H2.1 LED3.2 U5.13 | length 46.2
  Top Layer w0.28: U5.13 80.799,73.75 82.75,75.701 v1@83.801,75.701 ; v1(89.6,74.4) v1(92.1,74.4) ; v1(101,72.45) 102.2,72.45 102.501,72.149 102.501,68.5 103.649,67.344 103.649,59.14 101.838,57.339 LED3.2 ; LED3.2 105.676,56.35 H2.1
  Bottom Layer w0.28: v1(83.8,75.7) 86.75,75.7 88.05,74.4 v1(89.6,74.4) ; v1@92.099,74.405 94.055,72.45 v1(101,72.45)
SCL: C3.2 R4.1 U2.6 | length 8.9
  Top Layer w0.28: U2.6@60.004,43.526 60.004,45.454 60.901,46.249 64.7,46.25 C3.2 65.216,46.351 R4.1@65.216,47.799
SD_CK: R9.1 U5.28 | length 16.5
  Top Layer w0.28: v1(71.2,66.45) 71.2,64.15 72.151,63.199 74.05,63.199 74.9,62.349 R9.1 ; v1(71.55,71.85) 72.2,71.85 72.5,71.55 U5.28
  Bottom Layer w0.28: v1(71.2,66.45) 71.2,71.5 v1(71.55,71.85)
SD_CLK: CON2.5 R9.2 | length 3.1
  Top Layer w0.28: R9.2 74.9,56.191 CON2.5
SD_CMD: CON2.3 R10.1 U5.16 | length 32.2
  Top Layer w0.28: v1(71.95,65.7) 71.95,64.301 72.501,63.75 76.25,63.75 77.083,62.917 77.083,61.649 77.083,56.206 CON2.3 ; v1(77.65,75.5) 77.85,75.5 78.1,75.25 U5.16
  Bottom Layer w0.28: v1(71.95,65.7) 70.85,65.701 70.4,66.15 70.4,71.901 71.05,72.551 74.299,72.551 77.248,75.5 v1(77.65,75.5)
SD_D0: CON2.7 R8.1 U5.42 | length 20.1
  Top Layer w0.28: v1(72.2,62.45) 72.2,61.8 72.35,61.65 R8.1@72.817,61.65 ; CON2.7 72.789,56.216 R8.1@72.789,61.629 ; U5.42 76.601,65.849 79.201,63.25 v1@79.201,62.201
  Bottom Layer w0.28: v1(72.2,62.45) 72.25,62.5 73.199,62.5 74,61.7 78.7,61.7 v1(79.2,62.2)
SD_D1: CON2.8 R7.1 U5.29 | length 22
  Top Layer w0.28: CON2.8 71.583,56.215 R7.1 71.583,60.817 67.4,65 67.4,69.95 68.5,71.049 U5.29
SD_D2: CON2.1 R12.1 U5.30 | length 27.6
  Top Layer w0.127: CON2.1@79.324,56.074 CON2.1
  Top Layer w0.28: v1(69.2,64.25) 68.05,65.4 68.05,69.35 69.249,70.549 U5.30 ; CON2.1@79.323,56.16 79.323,56.425 80.032,57.133 R12.1@80.032,57.85 ; v1(79.85,59) 80.033,58.817 R12.1@80.033,57.85
  Bottom Layer w0.28: v1(69.2,64.25) 69.2,64.1 74.3,59 v1(79.85,59)
SD_D3: CON2.2 R11.1 U5.41 | length 11.6
  Top Layer w0.28: U5.41 76.101,65.598 78.267,63.432 R11.1 78.267,56.202 CON2.2
SD_NCD: CON2.9 R6.1 | length 1.9
  Top Layer w0.28: R6.1 69.767,57.233 70.533,56.467 CON2.9@70.533,56.168
SDA: C4.2 R5.1 U2.7 | length 8.9
  Top Layer w0.28: U2.7@61.274,43.526 61.274,42.376 61.65,42 63.349,42 63.75,42.399 63.75,44.301 64.35,44.901 C4.2 ; C4.2 65.217,44.788 R5.1
SEL1: U4.4 U5.3 | length 15.7
  Top Layer w0.224: v1(77.3,76.85) 77.299,76.8 77.499,76.6 v1(79.95,76.6) ; v1(77.3,76.85) U4.4
  Top Layer w0.28: U5.3 81.1,68.55 81.75,67.9 v1(82.05,67.9)
  Bottom Layer w0.224: v1(79.95,76.6) 80.5,76.6 82.05,75.05 v1(82.05,67.9)
SEL2: U4.8 U5.2 | length 20
  Top Layer w0.224: U5.2 80.801,68.05 81.95,66.9 v1@82.651,66.9
  Top Layer w0.28: U4.8 79.049,79.508 v1@79.049,79.549
  Bottom Layer w0.28: v1(79.05,79.55) 81.9,79.55 82.65,78.8 v1(82.65,66.9)
SPI-CLK: CON1.3 U5.15 | length 11.5
  Top Layer w0.224: CON1.3@76.25,82.124 76.25,81.05 75.899,80.699 75.3,80.699 74.799,80.199 74.799,78.302 76.951,76.15 77.901,76.15 78.599,75.452 U5.15
SPI-CS: CON1.4 U5.14 | length 14.6
  Top Layer w0.224: CON1.4@76.75,82.124 76.75,83.25 76.999,83.501 79.001,83.501 80.649,81.85 80.649,76 79.1,74.451 U5.14
SPI-MISO_FAKE: U4.5 U5.40 | length 17.6
  Top Layer w0.224: U4.5@77.7,77.892 77.858,77.892 v1(78.5,77.25)
  Top Layer w0.28: U5.40 75.601,65.099 v1(75.75,64.95)
  Bottom Layer w0.28: v1(75.75,64.95) 77.65,64.95 78.5,65.8 v1(78.5,77.25)
SPI-MISO_M: CON1.5 U4.3 | length 6.5
  Top Layer w0.224: U4.3@76.9,77.885 76.008,77.885 75.399,78.5 75.399,79.892 75.65,80.151 76.301,80.151 77.251,81.101 CON1.5@77.251,82.124
SPI-MISO_S: CON1.7 U4.2 U4.7 | length 7.6
  Top Layer w0.224: U4.2 77.101,78.5 77.499,78.901 77.908,78.901 79.45,78.901 79.801,79.252 79.801,81.7 79.377,82.124 CON1.7@78.249,82.124
SPI-MOSI: CON1.6 U4.10 | length 3
  Top Layer w0.224: U4.10 76.9,80.1 77.751,80.951 CON1.6@77.751,82.124
STATE: LED2.1 U5.45 | length 21.3
  Top Layer w0.28: U5.45 78.1,65.75 82.099,61.751 82.099,57.352 82.8,56.651 v1@84.901,56.651
  Bottom Layer w0.28: v1(84.9,56.65) 88.9,56.65 90.78,54.77 LED2.1
SWDCK: CON3.2 U5.37 | length 43.4
  Top Layer w0.28: v1(72.9,64.5) 72.9,65.651 U5.37 ; v1(104.45,64.1) 104.45,70.401 104.674,70.626 CON3.2
  Bottom Layer w0.28: v1@72.9,64.499 72.9,63.951 73.75,63.1 103.449,63.1 v1(104.45,64.1)
SWDIO: CON3.3 U5.34 | length 41.6
  Top Layer w0.28: v1(71.9,67.95) 71.9,68.35 72.1,68.55 U5.34 ; v1@103.601,71.799 105.749,71.799 CON3.3
  Bottom Layer w0.28: v1(71.9,67.95) 71.899,66.701 72.851,65.749 73.999,65.749 75.848,63.9 83.001,63.9 85.45,66.351 88.3,66.351 93.748,71.799 v1@103.601,71.799
  other v1: 103.6,71.8
TXD: pad.3@74.05,65.75 U5.38 | length 1.3
  Top Layer w0.224: pad.3@74.05,65.75 74.6,66.3 U5.38
USB_DM: pad.3@46.8,61.6 U5.32 | length 34.3
  Top Layer w0.28: pad.3@46.8,61.65 46.8,69.25 47.1,69.55 v1(47.7,69.55) ; v1(69.55,69.55) U5.32
  Bottom Layer w0.28: v1(47.7,69.55) v1(69.55,69.55)
USB_DM_: pad.3@46.8,60.3 USB1.2 | length 8.7
  Top Layer w0.28: USB1.2 48.051,54.1 48.35,54.4 48.35,59.6 47.751,60.199 pad.3@46.801,60.199
USB_DP: pad.3@44.375,61.6 U5.33 | length 35.9
  Top Layer w0.28: pad.3@44.4,61.6 44.4,68.15 44.7,68.45 v1@44.85,68.45 ; v1(69.6,68.45) 70.2,69.05 U5.33
  Bottom Layer w0.28: v1(44.85,68.45) v1(69.6,68.45)
USB_DP_: pad.3@44.375,60.3 USB1.3 | length 10.7
  Top Layer w0.28: pad.3@44.35,60.301 45.198,60.301 45.749,59.749 45.749,56.549 44.251,55.05 44.251,53.951 44.749,53.45 USB1.3
VBUS: C15.2 CON1.1 H1.2 U7.1 U7.3 USB1.1 | length 117.1
  Top Layer w0.3: 50.05,83.999 65.701,83.999 67.575,82.125 CON1.1 75.25,83 75,83.25 75,83.85 v2(75.35,84.2)
  Top Layer w0.4: v2@42.3,56.399 42.3,78.99 47.223,83.999 50.05,83.999 ; v2(45.15,54.75) USB1.1 ; U7.3 88.147,62.254 88.602,61.799 89.549,61.799 90.047,62.297 U7.1 90.047,63.727 89.35,64.424 89.35,65.5 v1(89.35,68.95)
  Bottom Layer w0.4: v2@42.3,56.399 42.3,55.701 43.25,54.751 v2(45.15,54.75) ; v2(75.35,84.2) 95.4,84.2 96.65,82.95 H1.2 96.65,78.699 94.901,76.95 91.449,76.95 90.7,76.201 90.7,71.451 89.35,70.101 v1(89.35,68.95)
  other v2: 42.3,56.4
VCAP: C7.2 U5.22 | length 2.2
  Top Layer w0.28: C7.2@74.401,75.505 74.401,74.901 74.7,74.601 74.901,74.601 75.099,74.4 U5.22
pads on no net: CON2. SW1. SW2. SW2.3 U2.10 U2.11 U5.18 U5.19 U5.25 U5.27 USB1.4
copper on no net:
  other v1: 108.45,42.15 43.7,42.2 107.5,42.55 109.4,42.55 44.65,42.6 42.8,42.65 107.15,43.35 109.7,43.4 42.5,43.45 45.05,43.45 107.5,44.3 109.35,44.3 42.85,44.35 44.7,44.35 108.45,44.7 43.75,44.75 43.35,81.8 108.4,81.95 42.4,82.25 44.35,82.25 107.5,82.3 109.35,82.35 42.1,83.1 44.65,83.15 109.7,83.2 107.15,83.25 42.45,83.95 44.25,84 109.35,84.1 107.55,84.15 43.35,84.35 108.4,84.5

## Polygon pours and split planes (outlines as drawn)
GND on Bottom Layer (solid): 38.1,87.9 114.45,87.9 115.45,86.9 115.45,42.7 110.85,38.1 40,38.1 38.8,39.3
GND on Top Layer (solid): 39.8,86.75 112.15,86.75 112.6,86.3 112.6,41.15 110.4,38.95 41.45,38.95 39.65,40.75

## Keep-outs
Keep-Out Layer:
  lines w0.2 net S$14186: 40.53,82.893 cw(c43.911,82.551) 43.771,85.946 ; 40.595,43.868 ccw(c43.993,43.821) 44.158,40.427 ; 107.963,85.948 cw(c108.128,82.554) 111.526,82.507 ; 108.146,40.424 ccw(c108.175,43.822) 111.572,43.937

## Silkscreen, mask and mechanical layers (free items; w line width, h text height)
Top Overlay:
  lines w0.28 net S$204186: 99.232,57.406 99.282,50.206 100.031,49.457 108.682,49.457 ; 99.282,57.406 108.682,57.455
  text "InfinityGauntlet Demo Board" at 48.05,82.15 h1
  text "+" at 95.153,81.153 h1 r135
  text "-" at 100.2,80.8 h1 r90
  text "Clicker" at 95.5,78.7 h1
  text "PA" at 102.974,55.4 h1
  text "BF" at 103.043,53.45 h1
  text "RC" at 102.997,51.456 h1
  text "TE" at 103.043,49.5 h1
  text "Snap" at 98.439,45.404 h1 r353
  text "Reset" at 89.4,44.15 h1
Top Solder:
  lines w0.602: 40.877,82.816 cw(c43.909,82.557) 43.85,85.6 ; 40.879,82.787 40.944,43.768 ; 40.95,43.75 ccw(c44.013,43.829) 43.734,40.777 ; 43.809,40.769 108.076,40.767 ; 43.857,85.603 108.124,85.601 ; 108.09,40.764 ccw(c108.137,43.862) 111.219,43.545 ; 108.124,85.609 cw(c108.117,82.557) 111.158,82.307 ; 111.17,82.306 111.217,43.544

## Text inside footprints (layer, text, board x,y; h text height)
BUZ1: Top Overlay "+" at 93.808,67.428 h2.03 r135; Top Overlay "-" at 94.106,74.38 h2.03 r90